# Altium PCB KH-6X6X5H-STM.pcbdoc
Units mm, origin at the board's own origin, x right, y up, seen from the top; angles counter-clockwise.
Board outline 24.1 x 18.76 mm, 2 copper layers (Top Layer, Bottom Layer), stack 0 mm thick; 1 components, 0 nets, 4 pads, 0 vias.
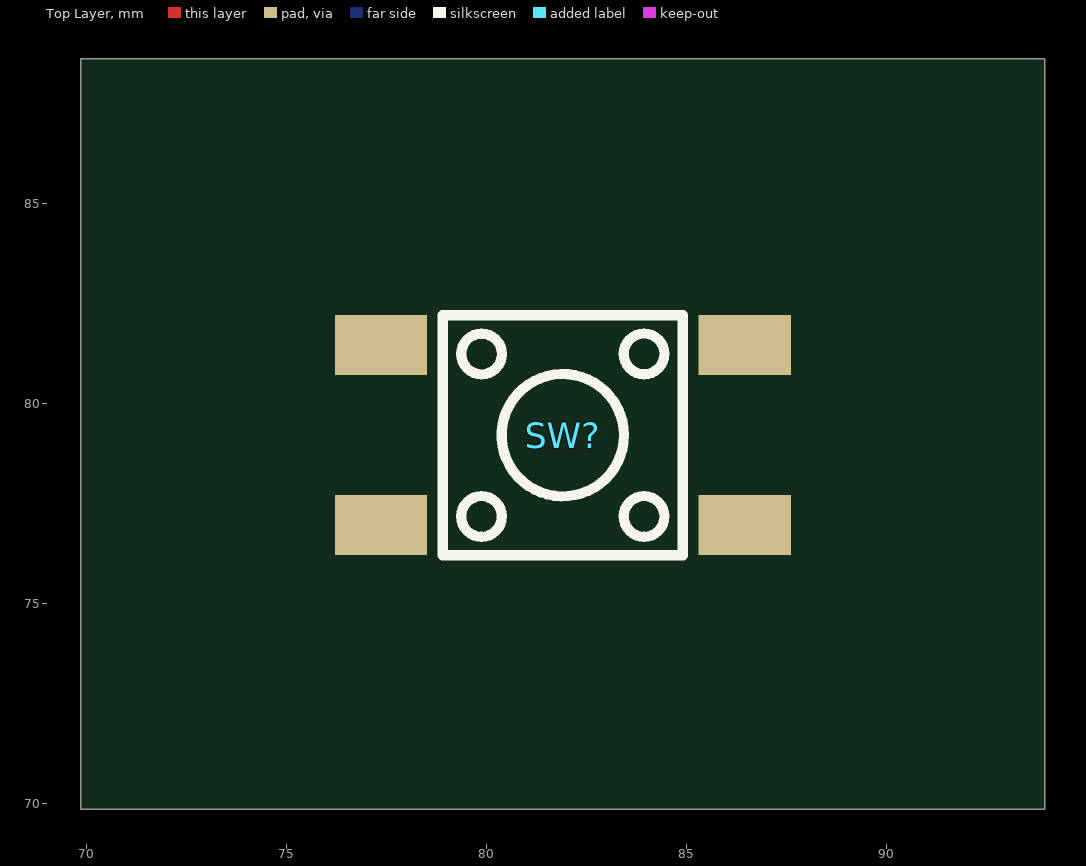
[diagram p0: Top Layer view]
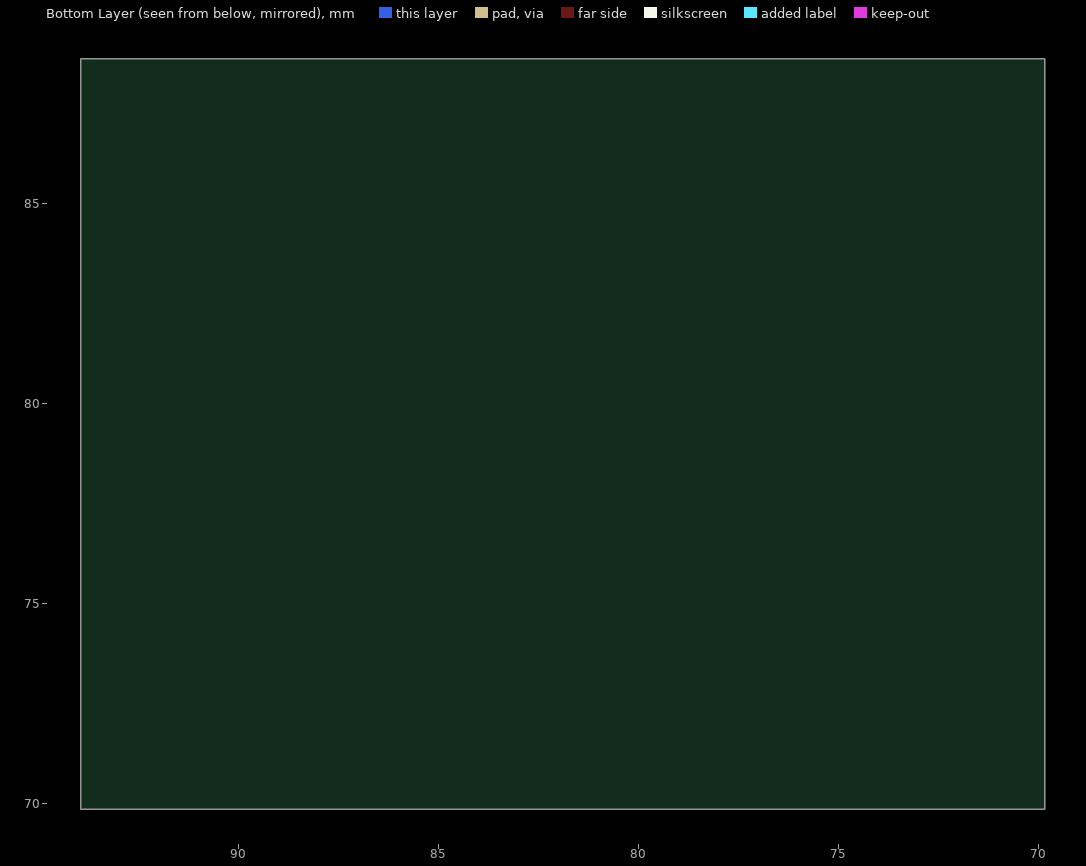
[diagram p1: Bottom Layer view, seen from below]

## Layer stack, top to bottom
Top Layer: signal copper (thickness not stored)
Bottom Layer: signal copper (thickness not stored)

## Board outline
93.95,69.85 69.85,69.85 69.85,88.61 93.95,88.61

## Components (designator, comment, footprint, x,y, rotation, side; value= is the part's Value field where it differs from the comment)
SW? "KH-6X6X5H-STM" SW-SMD_4P-L6.0-W6.0-P4.50-LS9.0_H5.0 81.9,79.2 r0 top

## Footprints (in the part's own frame and the unit in brackets; to place one, negate y for a bottom-side part, rotate by r counter-clockwise, add the part's x,y. Pads: shape width x height; smd on the part's side, far side on the other; paste and mask are expansions set on the pad)
SW-SMD_4P-L6.0-W6.0-P4.50-LS9.0_H5.0 [mm]
  rect 2.301x1.501 smd: 1(-4.549,2.25) 2(4.549,2.25) 3(-4.549,-2.25) 4(4.549,-2.25)
  silkscreen extent -3,-3 3,3

## Nets (pads, with @x,y where several pads share a name; then routed paths per layer and width w, separated by ;. In a path a pad name is that pad's centre, name@x,y a point inside that pad or via, vN(x,y) a via of type N, cw(c..) or ccw(c..) an arc to the next point about the centre after c; other vN are vias at no path point)
pads on no net: SW?.1 SW?.2 SW?.3 SW?.4